# Altium PCB MainPCB.PcbDoc
Units mil, origin at the board's own origin, x right, y up, seen from the top; angles counter-clockwise.
Board outline 2325 x 1355 mil, 2 copper layers (Top Layer, Bottom Layer); 40 components, 24 nets, 211 pads, 40 vias.
Unrouted connection lines stored in the file: 1.
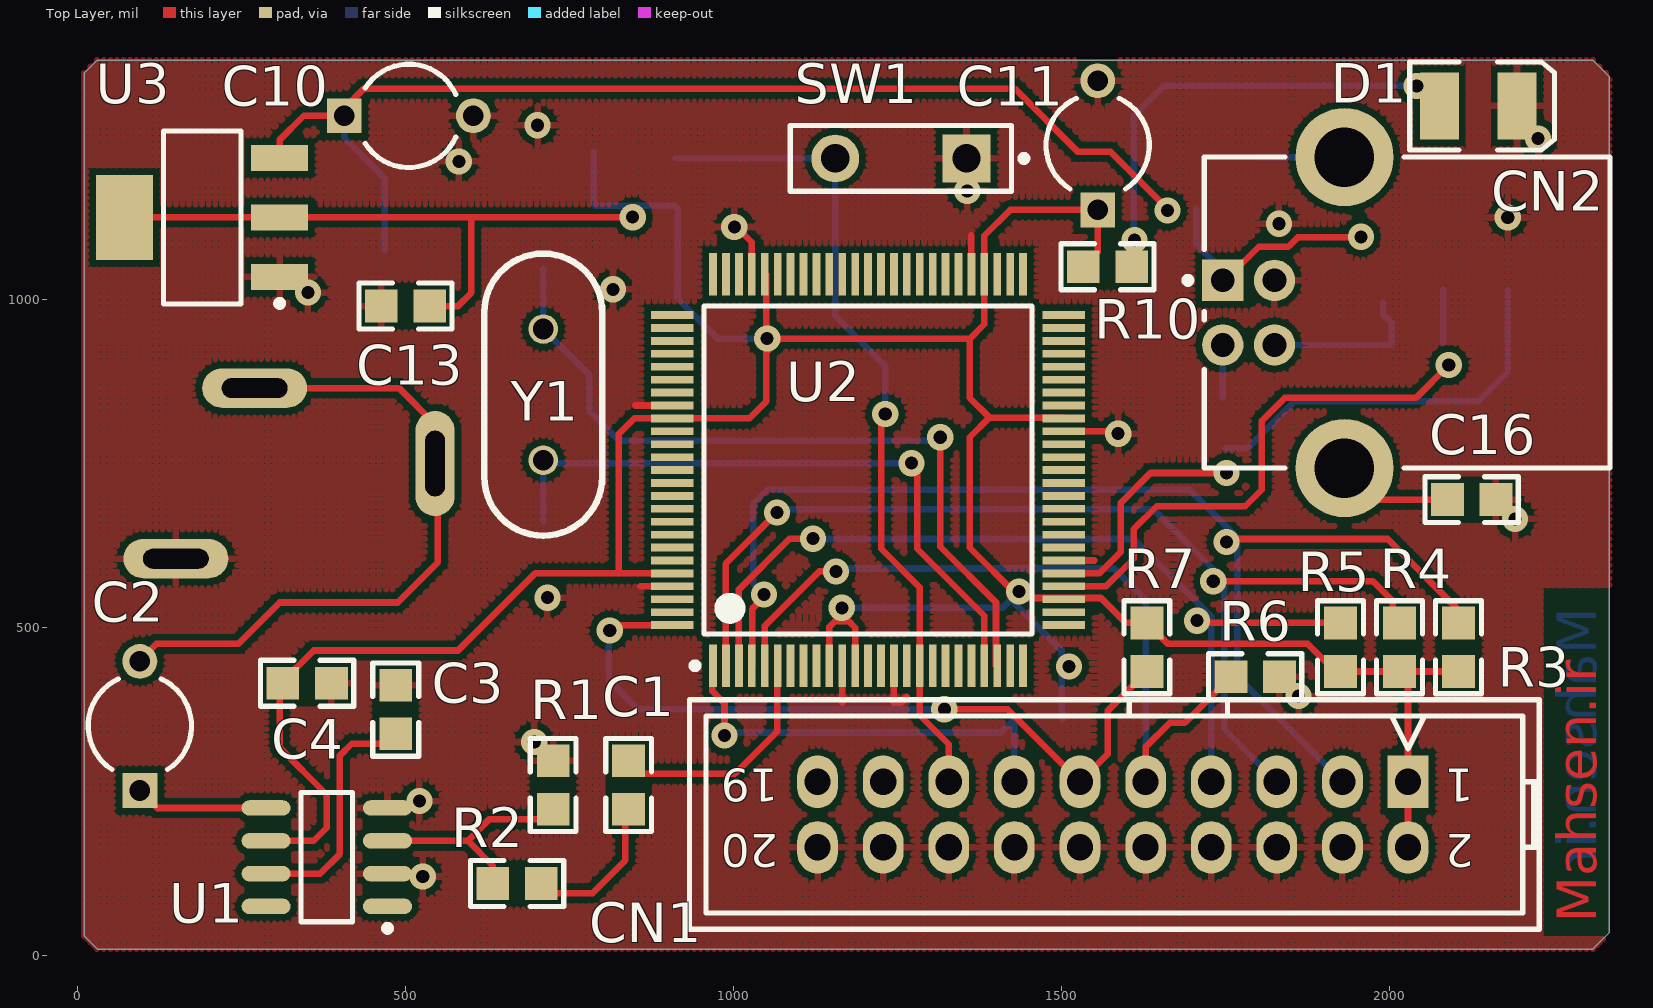
[diagram p0: Top Layer view]
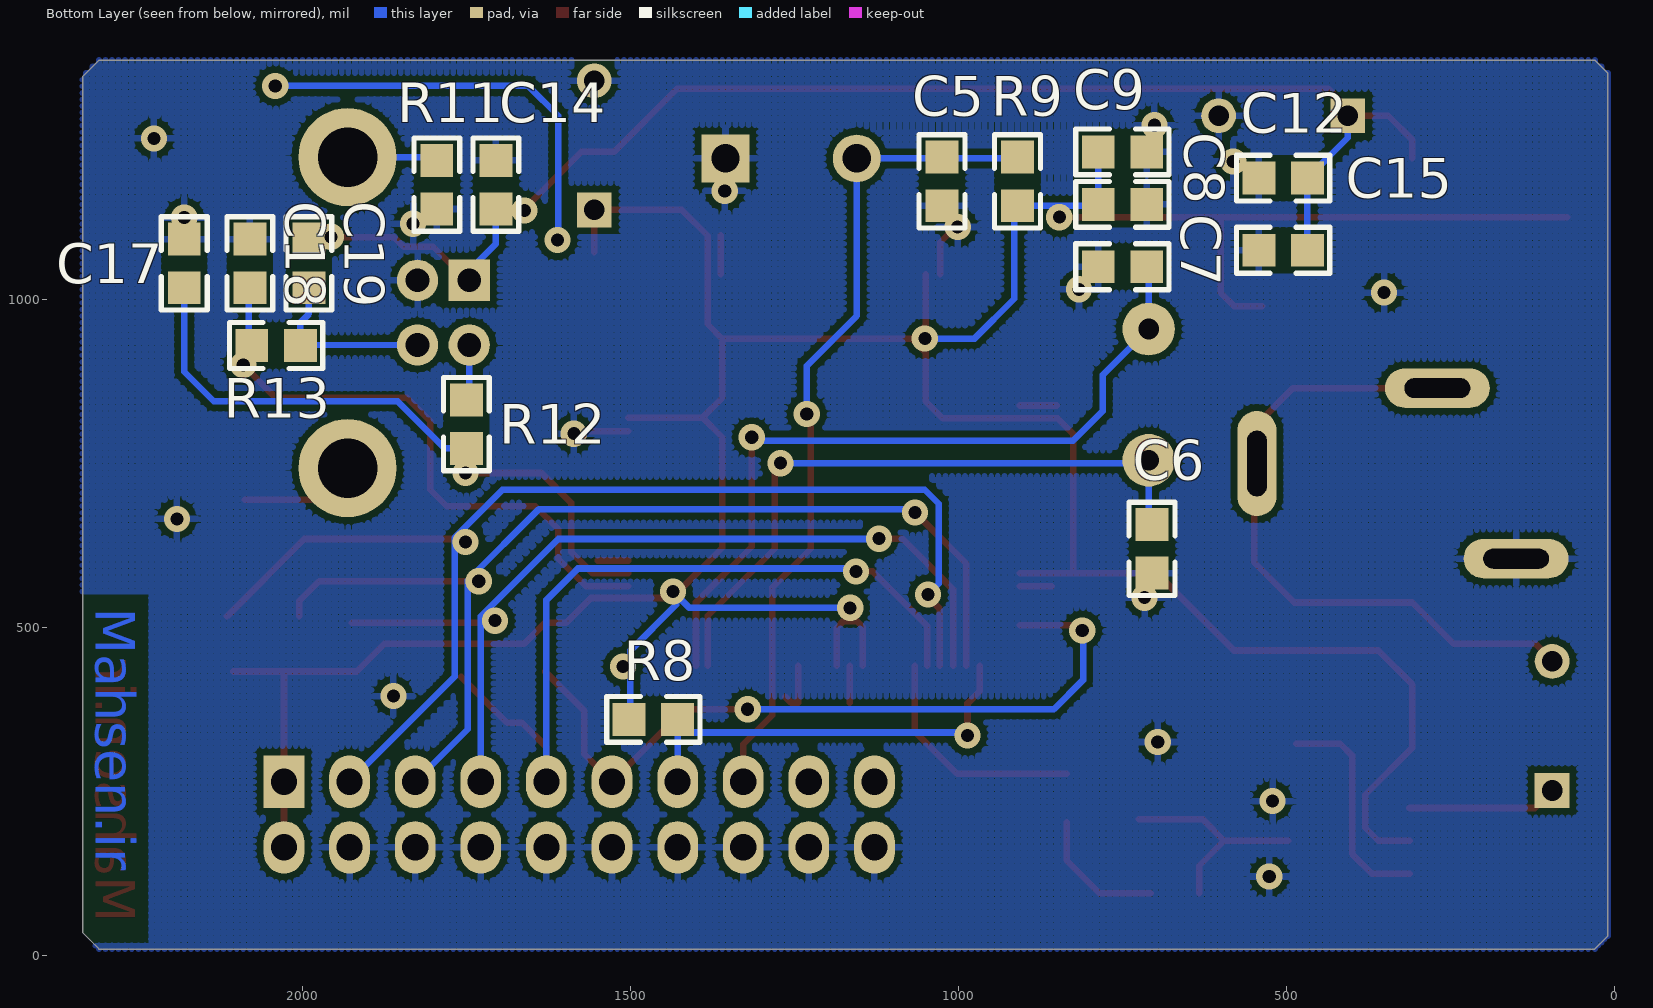
[diagram p1: Bottom Layer view, seen from below]
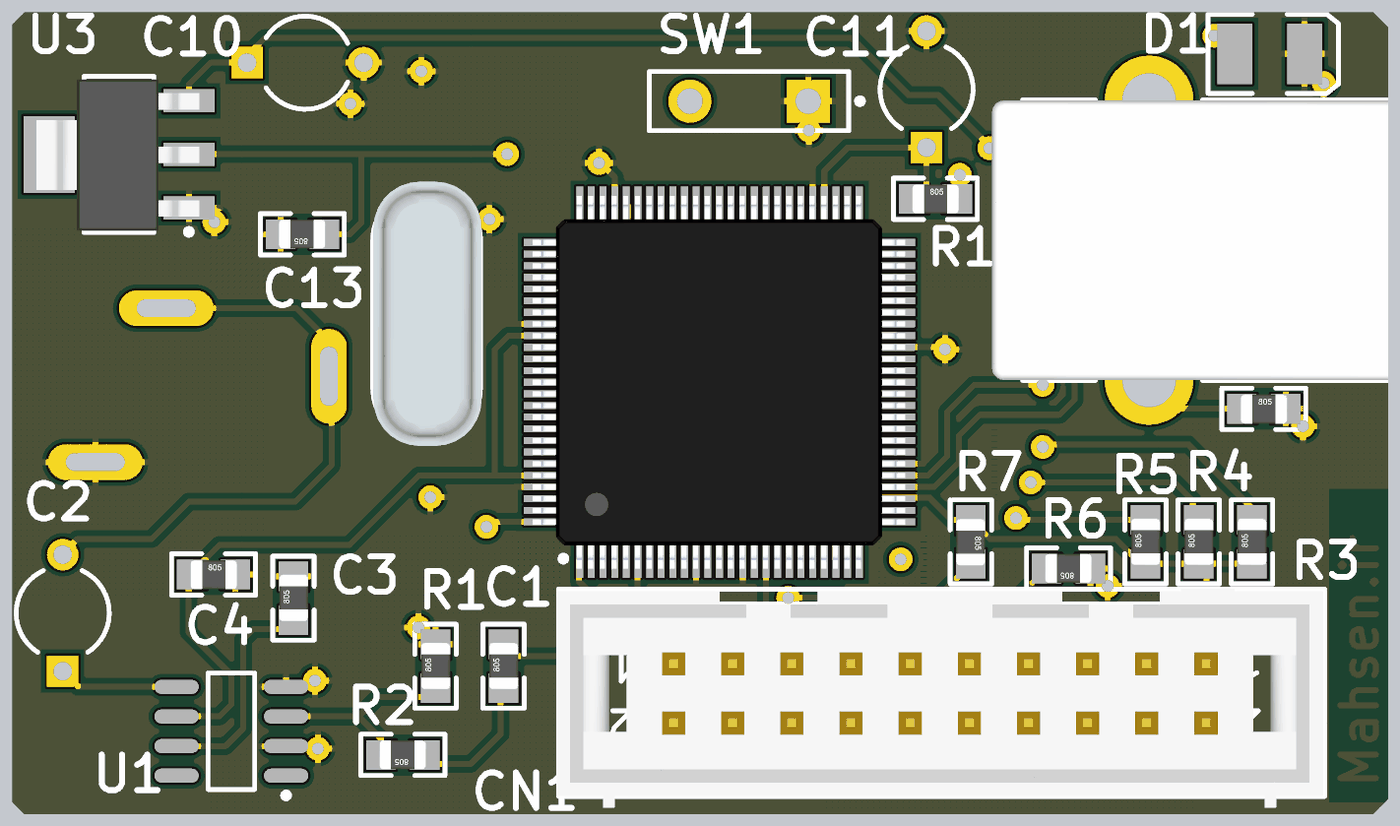
[diagram p2: 3D render of the assembled board from above, using the file's embedded part models]
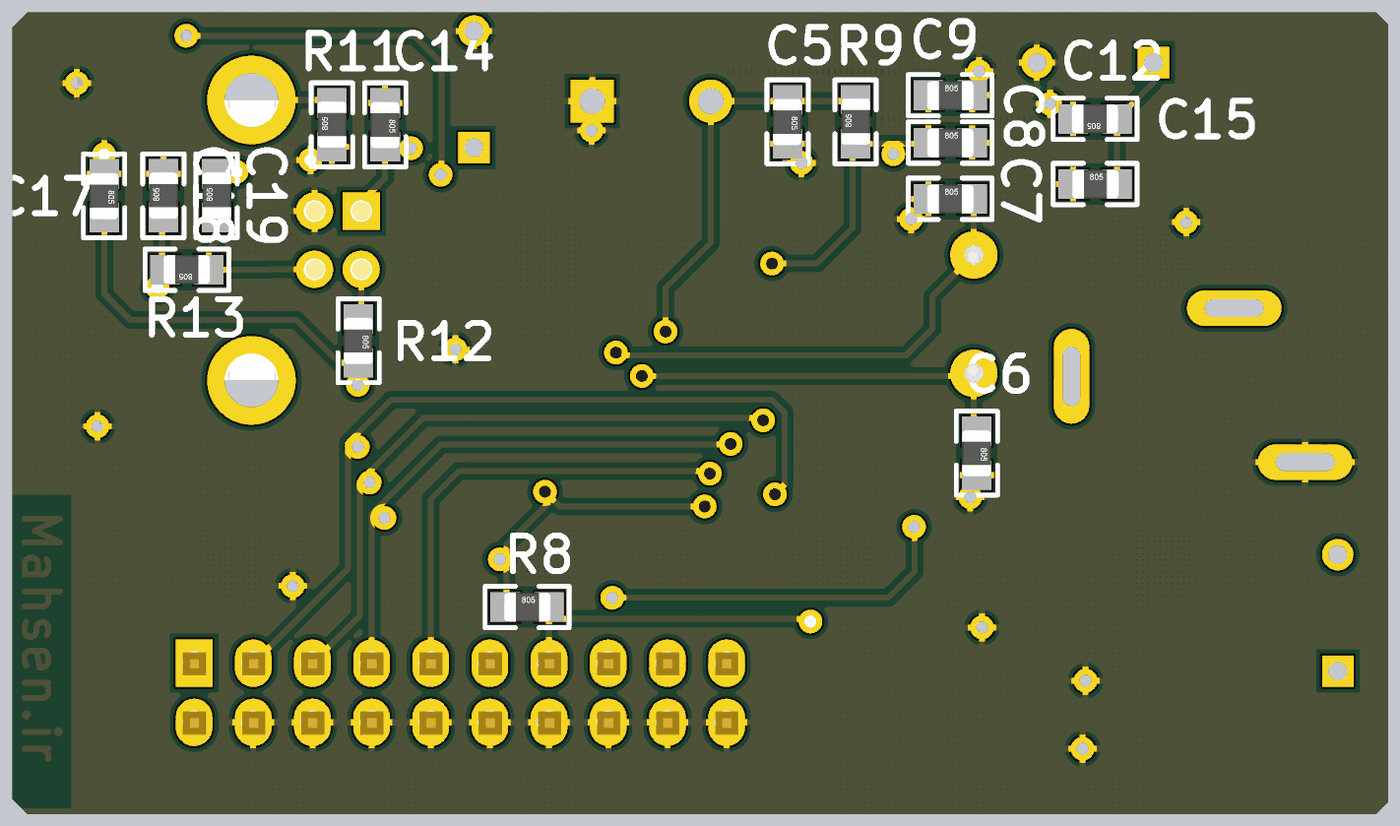
[diagram p3: 3D render of the assembled board from below, using the file's embedded part models]

## Layer stack, top to bottom
Top Layer: signal copper 1.4
Dielectric: dielectric 12.6, FR-4, Dk 4.8
Bottom Layer: signal copper 1.4

## Board outline
10,30 30,10 2310,10 2335,35 2335,1340 2310,1365 30,1365 10,1345

## Design rules (kind name [scope] priority, off if disabled: settings)
Clearance [All] p1: gap=10
PolygonConnect [All] p1: connectstyle=Relief reliefconductorwidth=10 reliefentries=4 polygonreliefangle="90 Angle"
RoutingVias [All] p1: holewidth=28 width=50 viastyle="Through Hole" minholewidth=28 minwidth=50 maxholewidth=28 maxwidth=50
SilkscreenOverComponentPads [All] p1: minsilkscreentomaskgap=10
SolderMaskExpansion [All] p1: expansion=4
Width [All] p1: maxlimit=10 minlimit=10 preferedwidth=10
27 further rules are at their usual default settings.

## Classes and differential pairs
component class U_AMP: C1 C2 C3 C4 R1 R2 U1
component class U_JTAG: CN1 R3 R4 R5 R6 R7 R8
component class U_MCU: C5 C6 C7 C8 C9 R9 SW1 U2 Y1
component class U_POWER: C10 C11 C12 C13 D1 R10 U3
component class U_USB: C14 C15 C16 C17 C18 CN2 R11 R12 R13

## Components (designator, comment, footprint, x,y, rotation, side; value= is the part's Value field where it differs from the comment)
C1 "100nF" 0805 840,260 r90 top
C2 "220uF" CAPR5-4X5 95,350 r90 top
C3 "100nF" 0805 485,375 r90 top
C4 "100nF" 0805 350,415 r0 top
C5 "100nF" 0805 1025,1180 r270 bottom
C6 "22pF" 0805 705,620 r270 bottom
C7 "22pF" 0805 750,1050 r180 bottom
C8 "100nF" 0805 750,1145 r180 bottom
C9 "100nF" 0805 750,1225 r180 bottom
C10 "22uF" CAPR5-4X5 505,1280 r0 top
C11 "22uF" CAPR5-4X5 1555,1235 r90 top
C12 "100nF" 0805 505,1185 r0 bottom
C13 "100nF" 0805 500,990 r180 top
C14 "220uF" 0805 1705,1175 r270 bottom
C15 "100nF" 0805 505,1075 r180 bottom
C16 "100nF" 0805 2125,695 r0 top
C17 "20pF" 0805 2180,1055 r270 bottom
C18 "20pF" 0805 2080,1055 r90 bottom
C19 "20pF" 0805 1990,1055 r90 bottom (schematic designator C18)
CN1 "JTAG" FKV20SN 2028,265 r180 top
CN2 "USB-B" CONN_USB 1785,980 r0 top
D1 "Power" 3.5X2.8X1.9 2135,1295 r0 top
R1 "1K" 0805 725,260 r90 top
R2 "10K" 0805 670,110 r180 top
R3 "10K" 0805 2105,470 r90 top
R4 "10K" 0805 2015,470 r90 top
R5 "10K" 0805 1925,470 r90 top
R6 "10K" 0805 1795,425 r180 top
R7 "10K" 0805 1630,470 r270 top
R8 "10K" 0805 1465,360 r180 bottom
R9 "10K" 0805 910,1180 r90 bottom
R10 "220R" 0805 1570,1050 r0 top
R11 "1M" 0805 1795,1175 r90 bottom
R12 "22R" 0805 1750,810 r270 bottom
R13 "22R" 0805 2040,930 r0 bottom
SW1 "RESET" SPST-2 1255,1215 r180 top
U1 "LM386" M08A_L 380,150 r180 top
U2 "LPC1768" LQFP_100 1205,740 r90 top
U3 "LT1117-3.3" SOT223_4 190,1125 r180 top
Y1 "12M" XTALA 710,855 r270 top

## Footprints (in the part's own frame and the unit in brackets; to place one, negate y for a bottom-side part, rotate by r counter-clockwise, add the part's x,y. Pads: shape width x height; smd on the part's side, far side on the other; paste and mask are expansions set on the pad)
3.5X2.8X1.9 [mm] "SM LED; 2 C-Bend Leads; Body 3.5 x 2.8 x 1.9 mm, inc leads (LxWxH typ)"
  rect 1.5x2.6 smd: 1(-1.5,0) 2(1.5,0)
  silkscreen extent -2.65,-1.7 2.95,1.7
0805 [mil]
  rect 50x50 smd: 1(-37,0) 2(37,0)
  silkscreen extent -71,-35 71,35, body extent -39,-25 40,24, height 31
CAPR5-4X5 [mm] "Capacitor; 2 Leads"
  rect 1.35x1.35 hole 0.8: 1(-2.5,0)
  round 1.35 hole 0.8: 2(2.5,0)
  silkscreen extent -1.69,-2 1.82,2
CONN_USB [mm] "Connector; USB1.1, Type B, Thru-Hole; 4 Position; Right Angle"
  rect 1.6x1.6 hole 0.92: 1(-1,1.25)
  round 1.6 hole 0.92: 2(-1,-1.25) 3(1,-1.25) 4(1,1.25)
  round 3.8 hole 2.3: 5(3.71,6.02) 6(3.71,-6.02)
  silkscreen extent -2.47,-6.02 13.99,6.02, body extent -3.03,-6 13.97,6, height 11
FKV20SN [mil] "Connector; BoxHeader; 10x2 Position ,2.54mm Pitch"
  rect 62x80 hole 40: 1(0,0)
  oval 62x80 hole 40: 2(0,100) 3(100,0) 4(100,100) 5(200,0) 6(200,100) 7(300,0) 8(300,100) 9(400,0) 10(400,100) 11(500,0) 12(500,100) 13(600,0) 14(600,100) 15(700,0) 16(700,100) 17(800,0) 18(800,100) 19(900,0) 20(900,100)
  silkscreen extent -200,-125 1095,225, body extent -197,-126 1098,244, height 366
LQFP_100 [mm] "LQFP, 100-Leads, Body 16.0x16.0mm (max), Pitch 0.50mm, IPC Medium Density"
  rect 1.65x0.3 smd: 1(-7.575,6) 2(-7.575,5.5) 3(-7.575,5) 4(-7.575,4.5) 5(-7.575,4) 6(-7.575,3.5) 7(-7.575,3) 8(-7.575,2.5) 9(-7.575,2) 10(-7.575,1.5) 11(-7.575,1) 12(-7.575,0.5) 13(-7.575,0) 14(-7.575,-0.5) 15(-7.575,-1) 16(-7.575,-1.5) 17(-7.575,-2) 18(-7.575,-2.5) 19(-7.575,-3) 20(-7.575,-3.5) 21(-7.575,-4) 22(-7.575,-4.5) 23(-7.575,-5) 24(-7.575,-5.5) 25(-7.575,-6) 51(7.575,-6) 52(7.575,-5.5) 53(7.575,-5) 54(7.575,-4.5) 55(7.575,-4) 56(7.575,-3.5) 57(7.575,-3) 58(7.575,-2.5) 59(7.575,-2) 60(7.575,-1.5) 61(7.575,-1) 62(7.575,-0.5) 63(7.575,0) 64(7.575,0.5) 65(7.575,1) 66(7.575,1.5) 67(7.575,2) 68(7.575,2.5) 69(7.575,3) 70(7.575,3.5) 71(7.575,4) 72(7.575,4.5) 73(7.575,5) 74(7.575,5.5) 75(7.575,6)
  rect 0.3x1.65 smd: 26(-6,-7.575) 27(-5.5,-7.575) 28(-5,-7.575) 29(-4.5,-7.575) 30(-4,-7.575) 31(-3.5,-7.575) 32(-3,-7.575) 33(-2.5,-7.575) 34(-2,-7.575) 35(-1.5,-7.575) 36(-1,-7.575) 37(-0.5,-7.575) 38(0,-7.575) 39(0.5,-7.575) 40(1,-7.575) 41(1.5,-7.575) 42(2,-7.575) 43(2.5,-7.575) 44(3,-7.575) 45(3.5,-7.575) 46(4,-7.575) 47(4.5,-7.575) 48(5,-7.575) 49(5.5,-7.575) 50(6,-7.575) 76(6,7.575) 77(5.5,7.575) 78(5,7.575) 79(4.5,7.575) 80(4,7.575) 81(3.5,7.575) 82(3,7.575) 83(2.5,7.575) 84(2,7.575) 85(1.5,7.575) 86(1,7.575) 87(0.5,7.575) 88(0,7.575) 89(-0.5,7.575) 90(-1,7.575) 91(-1.5,7.575) 92(-2,7.575) 93(-2.5,7.575) 94(-3,7.575) 95(-3.5,7.575) 96(-4,7.575) 97(-4.5,7.575) 98(-5,7.575) 99(-5.5,7.575) 100(-6,7.575)
  silkscreen extent -7.7,-6.35 6.35,6.82, body extent -8,-7.97 8,8.03, height 1.6
M08A_L [mm] "SOIC, 8-Leads, Body 4.9x3.9mm, Pitch 1.27mm, IPC High Density"
  oval 1.9x0.6 smd: 1(-2.35,1.905) 2(-2.35,0.635) 3(-2.35,-0.635) 4(-2.35,-1.905) 5(2.35,-1.905) 6(2.35,-0.635) 7(2.35,0.635) 8(2.35,1.905)
  silkscreen extent -2.48,-2.5 1,2.88, body extent -2,-2.5 2,2.5, height 1.75
SOT223_4 [mm] "SOT223, 4-Leads, Body 6.7x7.3mm (max), Pitch 2.30mm, IPC Medium Density"
  rect 2.2x1 smd: 1(-3,2.3) 2(-3,0) 3(-3,-2.3)
  rect 2.2x3.3 smd: 4(3,0)
  silkscreen extent -3.13,-3.35 1.5,3.45, body extent -3.45,-3.23 3.55,3.27, height 1.65
SPST-2 [mm] "Switch; 2 Leads"
  rect 1.85x1.85 hole 1.1: 1(-2.54,0)
  round 1.85 hole 1.1: 2(2.54,0)
  silkscreen extent -4.89,-1.27 4.28,1.27
XTALA [mil]
  round 45 / inner round 45 / far side round 80 hole 31.5: 1(-100,0) 2(100,0)
  silkscreen extent -215,-90 215,90, body extent -224,-90 223,93, height 138

## Part data
C1 C3 C4 C5 C6 C7 C8 C9 C12 C13 C14 C15 C16 C17 C18 C19: library part Cap, "Capacitor"
C2 C10 C11: library part "Cap Pol3", "Polarized Capacitor (Surface Mount)"
D1: library part LED3, "Typical BLUE SiC LED"
R1 R2 R3 R4 R5 R6 R7 R8 R9 R10 R11 R12 R13: library part Res2, "Resistor"
SW1: library part SW-PB, "Switch"
U1: library part LM386MX-1, "Low Voltage Audio Power Amplifier, 8-pin Narrow SOIC"
Y1: library part XTAL, "Crystal Oscillator"

## Free pads (board coordinates)
  oval 60x160 hole 30 slot 100 at 90 deg: 0(545,750)
  oval 160x60 hole 30 slot 100 at 0 deg: 1(270,865) 2(150,605)

## Via types
v1: diameter 40, hole 20, Top Layer to Bottom Layer, 40 vias

## Nets (pads, with @x,y where several pads share a name; then routed paths per layer and width w, separated by ;. In a path a pad name is that pad's centre, name@x,y a point inside that pad or via, vN(x,y) a via of type N, cw(c..) or ccw(c..) an arc to the next point about the centre after c; other vN are vias at no path point)
3V3: C4.1 C8.1 C9.1 C11.1 C13.1 CN1.1 CN1.2 R3.1 R4.1 R5.1 R7.1 R8.1 R9.1 R10.1 U1.6 U2.10 U2.12 U2.28 U2.42 U2.54 U2.71 U2.84 U2.96 U3.2 | length 6045.5
  Top Layer w10: 71.89,1125.52 600,1125.52 ; U1.6@312.48,175 360,175 380,195 380,245 308,317 308,413 360,465 580,465 697.52,582.52 825,582.52 ; C13.1 580,990 600,1010 600,1125.52 ; v1(846.21,1125.52) 600,1125.52 ; U2.96 825,582.52 ; U2.71@1050,1038.23 1050,960 v1@1070,940 ; U2.10 1145.94,500.94 1155,510 1175,510 1185.31,499.68 U2.12 ; 1360,935 1360,850 1390,820 ; v1@1430,545 1560,545 1598,507 R7.1 1662,475 1875,475 1917,433 R5.1 R4.1 R4.1@2025,433 ; v1@1431.21,550.52 1360,621.73 1360,790 1390,820 ; U2.42@1503.23,820 1390,820 ; v1(1511.21,440.52) v1@1514.73,437 ; R10.1@1555,1072 C11.1 1421.57,1136.57 1382.17,1097.17 U2.54 1382.17,962.17 1360,940 v1@1070,940 ; CN1.2 CN1.1 2028,430 R4.1@2025,433 ; R3.1 R4.1@2025,433 ; 825,582.52 825,795 848.74,818.74 U2.84 1023.74,818.74 1050,845 1050,920 v1@1070,940
  Bottom Layer w10: C8.1 C9.1 ; C8.1@789,1143 R9.1 915,1138 915,1001.04 975.52,940.52 v1(1051.21,940.52) ; v1(1165,530) 1410,530 v1(1435,555) ; v1@1430,545 1430,535 1500,465 1500,362 R8.1
5V: C10.1 C12.1 C14.2 C15.2 CN2.1 U3.3 | length 1850
  Top Layer w10: U3.3 308.11,1243.11 345,1280 C10.1 406.57,1291.57 436.57,1321.57 1428.43,1321.57 1525,1225 1575,1225 v1@1660,1140
  Bottom Layer w10: C10.1 406.57,1246.43 C12.1 C15.2 ; C14.2 1705,1085 1745.63,1044.37 CN2.1
  other v1: 1661.21,1135.52
GND: C3.2 C4.2 C5.2 C6.2 C7.1 C8.2 C9.2 C10.2 C11.2 C12.2 C13.2 C14.1 C15.1 C16.2 C17.1 C18.2 CN1.4 CN1.6 CN1.8 CN1.10 CN1.12 CN1.14 CN1.16 CN1.18 CN1.20 CN2.4 D1.2 pad.2 R1.2 R6.1 R11.1 SW1.1 U1.2 U1.4 U2.11 U2.15 U2.31 U2.41 U2.55 U2.72 U2.83 U2.97 U3.1 | length 514.2
  Top Layer w10: 850.19,838.43 U2.83 ; 857.83,562.83 U2.97 ; v1@1004.48,1110.52 1027.83,1087.17 U2.72 ; 1165.63,385.63 U2.11 ; U2.15 1244.37,385.63 1255.08,385.63 1263.74,394.29 ; U2.55 1362.48,1097.52 ; U2.31 1549.63,602.2 ; U2.41 v1@1589.06,799.06
  other v1: 526.21,120.52 521.21,235.52 696.21,325.52 1861.21,395.52 716.21,545.52 2191.21,665.52 1586.21,795.52 351.21,1010.52 816.21,1015.52 1001.21,1110.52 1831.21,1115.52 2180,1125 1356.21,1165.52 581.21,1210.52 2226.21,1245.52 701.21,1265.52
NetC1_1: C1.1 R2.1 | length 206.7
  Top Layer w10: R2.1@707,95 785,95 835,145 C1.1@835,203
NetC1_2: C1.2 U2.6 | length 358.4
  Top Layer w10: C1.2@835,277 1002,277 1066.24,341.24 U2.6@1066.24,441.77
NetC2_1: C2.1 U1.5 | length 228.5
  Top Layer w10: C2.1 121.57,225 U1.5@312.48,225
NetC2_2: C2.2 pad.0 pad.1 | length 1036.2
  Top Layer w10: C2.2@79.21,434.21 120,475 245,475 308.15,538.15 488.15,538.15 549.37,599.37 pad.0@549.37,784.21 ; pad.1@315,865 490,865 545,810 pad.0
NetC3_1: C3.1 U1.7 | length 342.4
  Top Layer w10: U1.7@312.48,125 370,125 400,155 400,305 418,323 C3.1@485,323
NetC5_1: C5.1 CN1.15 R9.2 SW1.2 U2.17 | length 1256.7
  Top Layer w10: v1@1225,815 1225,620 1283.74,561.26 U2.17 1283.74,366.26 1328,322 CN1.15
  Bottom Layer w10: R9.2@912,1215 SW1.2 1155,975 1231.21,898.79 v1(1231.21,825.52)
NetC6_1: C6.1 U2.22 Y1.2 | length 1006.6
  Top Layer w10: v1@1280,750 1280,620 1382.17,517.83 U2.22
  Bottom Layer w10: C6.1@710,662 Y1.2 714.48,750.52 v1(1271.21,750.52)
NetC7_2: C7.2 U2.23 Y1.1 | length 1183.1
  Top Layer w10: v1(1315,790) 1315,623.28 1400,538.28 U2.23@1400,441.77
  Bottom Layer w10: C7.2@710,1047 Y1.1 780,885 780,830 825,785 v1@1315,785
NetC16_1: C16.1 CN2.5 CN2.6 R11.2 | length 307.9
  Top Layer w10: CN2.6 1979.06,695 C16.1
  Bottom Layer w10: R11.2@1800.01,1217.01 CN2.5
NetC17_2: C17.2 R12.2 U2.30 | length 956.8
  Top Layer w10: U2.30 1557.52,582.52 1590,615 1590,690 1635.52,735.52 v1(1751.21,735.52)
  Bottom Layer w10: R12.2 1783,773 1855,845 2135,845 2180,890 C17.2@2180,1013
NetC18_1: C18.1 R13.2 U2.29 | length 894.3
  Top Layer w10: U2.29 1567.83,562.83 1610,605 1610,650 1645,685 1780,685 1805,710 1805,815 1840,850 1955,850 2040,850 v1(2090,900)
  Bottom Layer w10: R13.2@2082,935 C18.1@2082,1015
NetCN1_3: CN1.3 R3.2 U2.4 | length 1891
  Top Layer w10: U2.4@1028.15,441.77 1028.15,528.15 1046.21,546.21 v1(1046.21,550.52) ; v1(1751.21,630.52) 1755.69,635 1997,635 R3.2@2115,517
  Bottom Layer w10: v1(1046.21,550.52) 1030,566.73 1030,688.8 1051.2,710 1695,710 1768,637 1768,425 CN1.3
NetCN1_5: CN1.5 R4.2 U2.2 | length 1638.4
  Top Layer w10: U2.2@988.15,441.77 988.15,597.46 v1(1066.21,675.52) ; v1(1731.21,570.52) 1974.48,570.52 2005,540 R4.2@2005,517
  Bottom Layer w10: v1@1070,680 1640,680 1748,572 1748,345 CN1.5
NetCN1_7: CN1.7 R5.2 U2.3 | length 1394.8
  Top Layer w10: U2.3 1008.15,558.15 1085.52,635.52 v1(1121.21,635.52) ; v1@1712.69,517 v1(1706.21,510.52) 1709.73,507 R5.2
  Bottom Layer w10: v1@1125,635 1610,635 1728,517 CN1.7
NetCN1_9: CN1.9 R6.2 U2.5 | length 1196
  Top Layer w10: U2.5 1047.52,502.52 1130.52,585.52 v1(1156.21,585.52) ; CN1.9 1628,318 1665,355 1688,355 R6.2
  Bottom Layer w10: v1@1160,590 1580,590 1628,542 CN1.9
NetCN1_11: CN1.11 R7.2 U2.100 | length 1186.4
  Top Layer w10: v1(811.21,495.52) 819.47,503.78 U2.100 ; v1@1310,375 v1@1322,363 ; v1(1321.21,375.52) 1417.48,375.52 CN1.11 ; CN1.11@1528,273 CN1.11 ; R7.2 1570,373 1570,307 CN1.11
  Bottom Layer w10: v1@810,490 810,420 854.48,375.52 v1(1321.21,375.52)
NetCN1_13: CN1.13 R8.2 U2.1 | length 645.3
  Top Layer w10: U2.1@967.56,441.77 967.56,403.08 986.21,384.42 v1(986.21,335.52)
  Bottom Layer w10: v1@1000,340 1408,340 R8.2 CN1.13
NetCN2_2: CN2.2 R12.1 | length 79.4
  Bottom Layer w10: R12.1@1745.63,851.37 CN2.2
NetCN2_3: CN2.3 R13.1 | length 249
  Bottom Layer w10: CN2.3 R13.1 2003,965 1990,978 1990,995
NetD1_1: D1.1 R10.2 | length 638.3
  Bottom Layer w10: v1@1610,1091.73 1610,1280 1655.52,1325.52 v1(2041.21,1325.52)
  other v1: 1611.21,1090.52
NetR1_1: R1.1 R2.2 U1.3 | length 336.9
  Top Layer w10: U1.3@497.52,175 595,175 ; R2.2@633,95 633,137 595,175 ; R1.1@725,208 628,208 595,175
pads on no net: C19.1 C19.2 CN1.17 CN1.19 U1.1 U1.8 U2.7 U2.8 U2.9 U2.13 U2.14 U2.16 U2.18 U2.19 U2.20 U2.21 U2.24 U2.25 U2.26 U2.27 U2.32 U2.33 U2.34 U2.35 U2.36 U2.37 U2.38 U2.39 U2.40 U2.43 U2.44 U2.45 U2.46 U2.47 U2.48 U2.49 U2.50 U2.51 U2.52 U2.53 U2.56 U2.57 U2.58 U2.59 U2.60 U2.61 U2.62 U2.63 U2.64 U2.65 U2.66 U2.67 U2.68 U2.69 U2.70 U2.73 U2.74 U2.75 U2.76 U2.77 U2.78 U2.79 U2.80 U2.81 U2.82 U2.85 U2.86 U2.87 U2.88 U2.89 U2.90 U2.91 U2.92 U2.93 U2.94 U2.95 U2.98 U2.99 U3.4
copper on no net: | length 430.5
  Top Layer w10: 384.02,538.15 451.85,538.15 ; 549.37,659.37 549.37,784.21 ; 1760,1025 1760,1040 1800.52,1080.52 1845.71,1080.52 1860.19,1095 v1@1960,1095
  other v1: 1956.21,1095.52

## Polygon pours and split planes (outlines as drawn)
GND on Top Layer "Top Layer-No Net" (hatched 90Degree grid 10 track 9, pour order 4): 2310,1365 30,1365 10,1345 10,30 30,10 2310,10 2335,35 2335,1340
GND on Bottom Layer "Top Layer-No Net" (hatched 90Degree grid 10 track 9, pour order 6): 2310,1365 30,1365 10,1345 10,30 30,10 2310,10 2335,35 2335,1340

## Other copper
Top Layer:
  text "Mahsen.ir" at 2315,50 h60 r90
Bottom Layer:
  text "Mahsen.ir" at 2315,530 h60 r90

## Text inside footprints (layer, text, board x,y; h text height)
CN1: Top Overlay "2" at 2128,185 h50 r180; Top Overlay "1" at 2128,285 h50 r180; Top Overlay "19" at 1068,285 h50 r180; Top Overlay "20" at 1068,185 h50 r180